# EAGLE board two_tone_#02 (EAGLE 6.6.0)
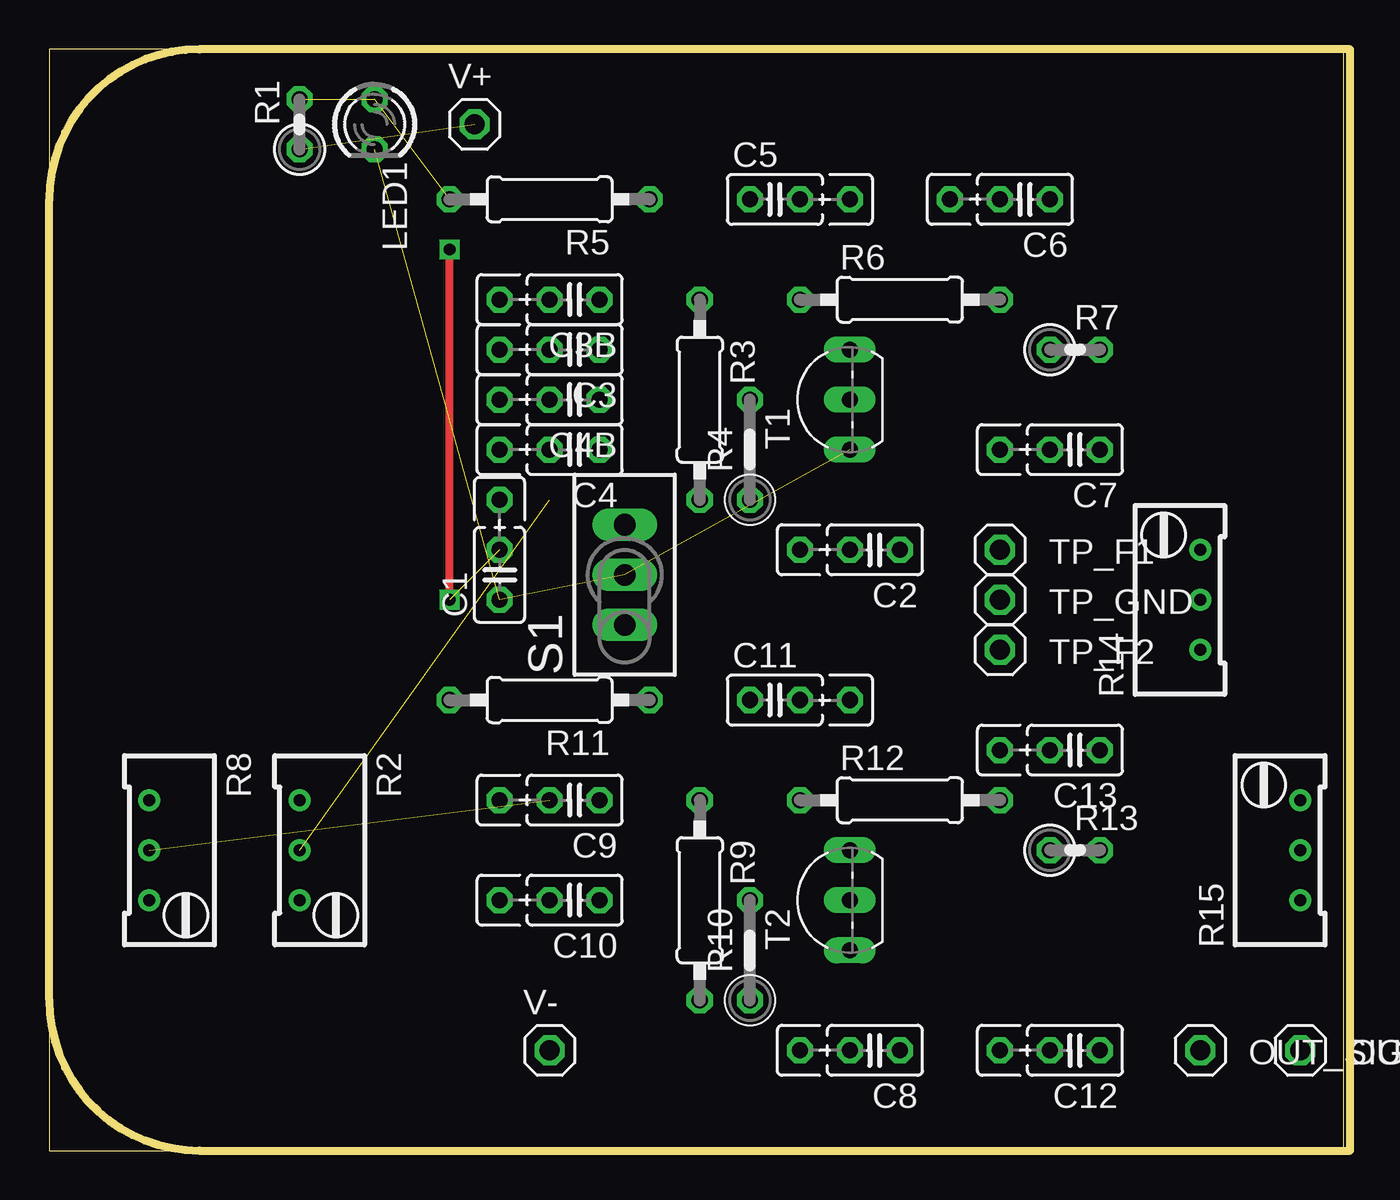
[diagram p0: board, top side]
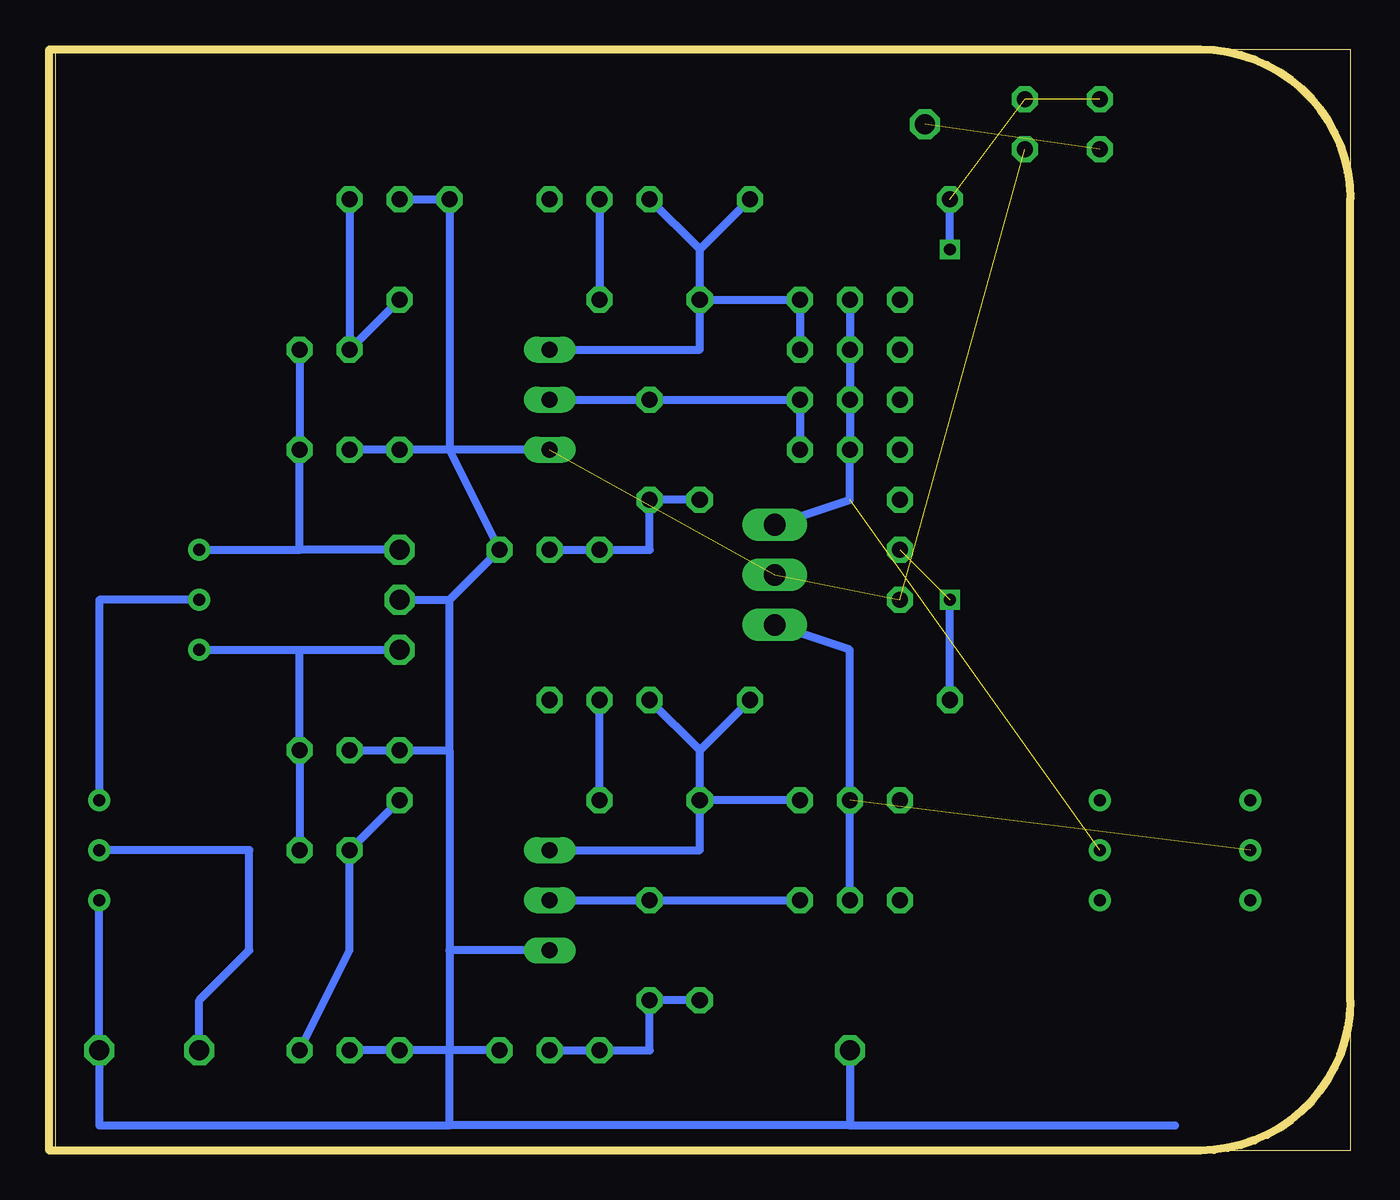
[diagram p1: board, bottom side, seen from below]

Size 66.04 x 55.88 mm. Coordinates in mm from the lower left corner, seen from the top.
Outline: 7.62,0 0,0 0,7.62
Outline: 7.62,0 65.71,0 65.71,55.87 0,55.87 0,48.26
Outline: 0,48.26 arc-90 7.62,55.88 66.04,55.88 66.04,0 7.62,0
Outline: 0,7.62 arc90 7.62,0
Outline: 0,7.62 0,48.26
Copper layers (1*16): Top 0.035mm / dielectric 1.5mm / Bottom 0.035mm
Design rules "default": minimum track width 10mil, minimum drill 24mil, track to track 8mil, track to pad 8mil, pad to pad 8mil, via to via 8mil, smd to smd 8mil, copper to edge 40mil, drill to drill 8mil, minimum pad ring 10mil, minimum via ring 8mil, stop-mask expansion 4mil, vias tented up to drill 0mil, thermal gap 10mil

## Footprints (pad centres in the part's own frame; a part is rotated, then mirrored left to right if it is on the bottom)
C025_050-025X075 = drill 0.813 octagon: 1 -1.27,0; 2 1.27,0; 3 3.81,0
LED3MM = drill 0.813 octagon: A -1.27,0; K 1.27,0
1X01 = drill 1.016 octagon: 1 0,0
0207/2V = drill 0.813 octagon: 1 -1.27,0; 2 1.27,0
RTRIM64W = drill 0.61: 1 1.27,-2.54; 2 1.27,0; 3 1.27,2.54
0207/10 = drill 0.813 octagon: 1 -5.08,0; 2 5.08,0
0207/5V = drill 0.813 octagon: 1 -2.54,0; 2 2.54,0
TL3XPO = drill 1.1 pad 1.422 long: 1 -2.54,0; 2 0,0; 3 2.54,0
TO92-EBC = drill 0.813 long: B 0,-1.27; C 2.54,-1.27; E -2.54,-1.27

## Placement (x,y rotation side)
C1  [C025_050-025X075]  22.86,29.21 90 top
C2  22n  [C025_050-025X075]  41.91,30.48 180 top
C3  10n  [C025_050-025X075]  26.67,40.64 180 top
C3B  3n3  [C025_050-025X075]  26.67,43.18 180 top
C4  10n  [C025_050-025X075]  26.67,35.56 180 top
C4B  3n3  [C025_050-025X075]  26.67,38.1 180 top
C5  1u  [C025_050-025X075]  36.83,48.26 0 top
C6  22n  [C025_050-025X075]  49.53,48.26 180 top
C7  22n  [C025_050-025X075]  52.07,35.56 180 top
C8  10n  [C025_050-025X075]  41.91,5.08 180 top
C9  4n7  [C025_050-025X075]  26.67,17.78 180 top
C10  4n7  [C025_050-025X075]  26.67,12.7 180 top
C11  1u  [C025_050-025X075]  36.83,22.86 0 top
C12  3n3  [C025_050-025X075]  52.07,5.08 180 top
C13  3n3  [C025_050-025X075]  52.07,20.32 180 top
LED1  [LED3MM]  16.51,52.07 270 top
OUT_GND  [1X01]  63.5,5.08 0 top
OUT_SIG  [1X01]  58.42,5.08 0 top
R1  [0207/2V]  12.7,52.07 90 top
R2  [RTRIM64W]  13.97,15.24 180 top
R3  47k  [0207/10]  33.02,38.1 270 top
R4  47k  [0207/5V]  35.56,35.56 90 top
R5  2k2  [0207/10]  25.4,48.26 180 top
R6  4k7  [0207/10]  43.18,43.18 0 top
R7  4k7  [0207/2V]  52.07,40.64 0 top
R8  [RTRIM64W]  6.35,15.24 180 top
R9  33k  [0207/10]  33.02,12.7 270 top
R10  33k  [0207/5V]  35.56,10.16 90 top
R11  2k2  [0207/10]  25.4,22.86 180 top
R12  10k  [0207/10]  43.18,17.78 0 top
R13  10k  [0207/2V]  52.07,15.24 0 top
R14  [RTRIM64W]  57.15,27.94 0 top
R15  [RTRIM64W]  62.23,15.24 0 top
S1  TL39PO  [TL3XPO]  29.21,29.21 90 top
T1  2n3904  [TO92-EBC]  39.37,38.1 90 top
T2  2n3904  [TO92-EBC]  39.37,12.7 90 top
TP_F1  [1X01]  48.26,30.48 0 top
TP_F2  [1X01]  48.26,25.4 0 top
TP_GND  [1X01]  48.26,27.94 0 top
V+  [1X01]  21.59,52.07 0 top
V-  [1X01]  25.4,5.08 0 top

## Library data of the parts
C1-C3 C3B C4 C4B C5-C13 R1-R15 = resistor
LED1 = led
OUT_GND OUT_SIG TP_F1 TP_F2 TP_GND V+ V- = pinhead
S1 = switch
T1 T2 = transistor-neu-to92

## Nets
+3V3: C1.2 LED1.A R1.2 R5.2 R11.2
GND: C1.1 C2.1 C6.2 C7.2 C8.1 C12.2 C13.2 LED1.K OUT_GND.1 R15.1 S1.2 T1.E T2.E TP_GND.1 V-.1
N$1: C5.2 R6.1
N$2: C6.1 R6.2 R7.1
N$3: C2.2 R3.2 R4.1
N$4: C4.1 C4B.1 R4.2 T1.B
N$5: C3.1 C3B.1 C5.1 R3.1 R5.1 T1.C
N$6: C3.2 C3B.2 C4.2 C4B.2 R2.2 S1.3
N$7: C7.1 R7.2 R14.3 TP_F1.1
N$8: C8.2 R9.2 R10.1
N$9: C10.1 R10.2 T2.B
N$10: C9.1 C11.1 R9.1 R11.1 T2.C
N$11: C9.2 C10.2 R8.2 S1.1
N$12: C11.2 R12.1
N$13: C12.1 R12.2 R13.1
N$14: C13.1 R13.2 R14.1 TP_F2.1
N$17: R14.2 R15.3
N$18: OUT_SIG.1 R15.2
V+: R1.1 V+.1

## Tracks (layer width: path | path; a pad name or v marks a point on that pad's centre or on a via)
+3V3  (via drill 0.6)  (3 unrouted)
  Top 0.406: v20.32,27.94 v20.32,45.72
  Bottom 0.406: R11.2 v20.32,27.94 | v20.32,45.72 R5.2
GND  (3 unrouted)
  Bottom 0.406: T1.E 45.72,35.56 | 45.72,35.56 C7.2 | TP_GND.1 45.72,27.94 | 45.72,35.56 C2.1 45.72,27.94 | T2.E 45.72,10.16 | 45.72,10.16 45.72,5.08 | C13.2 45.72,20.32 | 45.72,20.32 45.72,10.16 | 45.72,20.32 45.72,27.94 | C8.1 45.72,5.08 | C6.2 45.72,48.26 45.72,35.56 | R15.1 OUT_GND.1 63.5,1.27 45.72,1.27 | 45.72,1.27 45.72,5.08 | 45.72,5.08 C12.2 | 25.4,1.27 45.72,1.27 | V-.1 25.4,1.27 | 25.4,1.27 8.89,1.27
N$1
  Bottom 0.406: C5.2 R6.1
N$2
  Bottom 0.406: R6.2 R7.1 C6.1
N$3
  Bottom 0.406: R3.2 R4.1 35.56,30.48 C2.2
N$4
  Bottom 0.406: T1.B R4.2 C4B.1 C4.1
N$5
  Bottom 0.406: R3.1 C3B.1 C3.1 | R3.1 33.02,45.72 | 33.02,45.72 R5.1 | T1.C 33.02,40.64 R3.1 | 33.02,45.72 C5.1
N$6  (1 unrouted)
  Bottom 0.406: C3B.2 C3.2 C4B.2 C4.2 25.4,33.02 S1.3
N$7
  Bottom 0.406: R14.3 53.34,30.48 | R7.2 C7.1 53.34,30.48 | TP_F1.1 53.34,30.48
N$8
  Bottom 0.406: R9.2 R10.1 35.56,5.08 C8.2
N$9
  Bottom 0.406: T2.B R10.2 C10.1
N$10
  Bottom 0.406: T2.C 33.02,15.24 R9.1 | C9.1 R9.1 | R9.1 33.02,20.32 | 33.02,20.32 C11.1 | R11.1 33.02,20.32
N$11  (1 unrouted)
  Bottom 0.406: C10.2 C9.2 25.4,25.4 S1.1
N$12
  Bottom 0.406: R12.1 C11.2
N$13
  Bottom 0.406: R12.2 R13.1 50.8,10.16 C12.1
N$14
  Bottom 0.406: R13.2 C13.1 53.34,25.4 | R14.1 53.34,25.4 | 53.34,25.4 TP_F2.1
N$17
  Bottom 0.406: R14.2 63.5,27.94 R15.3
N$18
  Bottom 0.406: OUT_SIG.1 58.42,7.62 55.88,10.16 55.88,15.24 R15.2
V+  (1 unrouted)